# Altium PCB CapTouchKeyboard_v2.0.PcbDoc
Units mil, origin at the board's own origin, x right, y up, seen from the top; angles counter-clockwise.
Board outline 4822.83 x 2755.91 mil, 2 copper layers (Top Layer, Bottom Layer); 98 components, 52 nets, 291 pads, 275 vias.
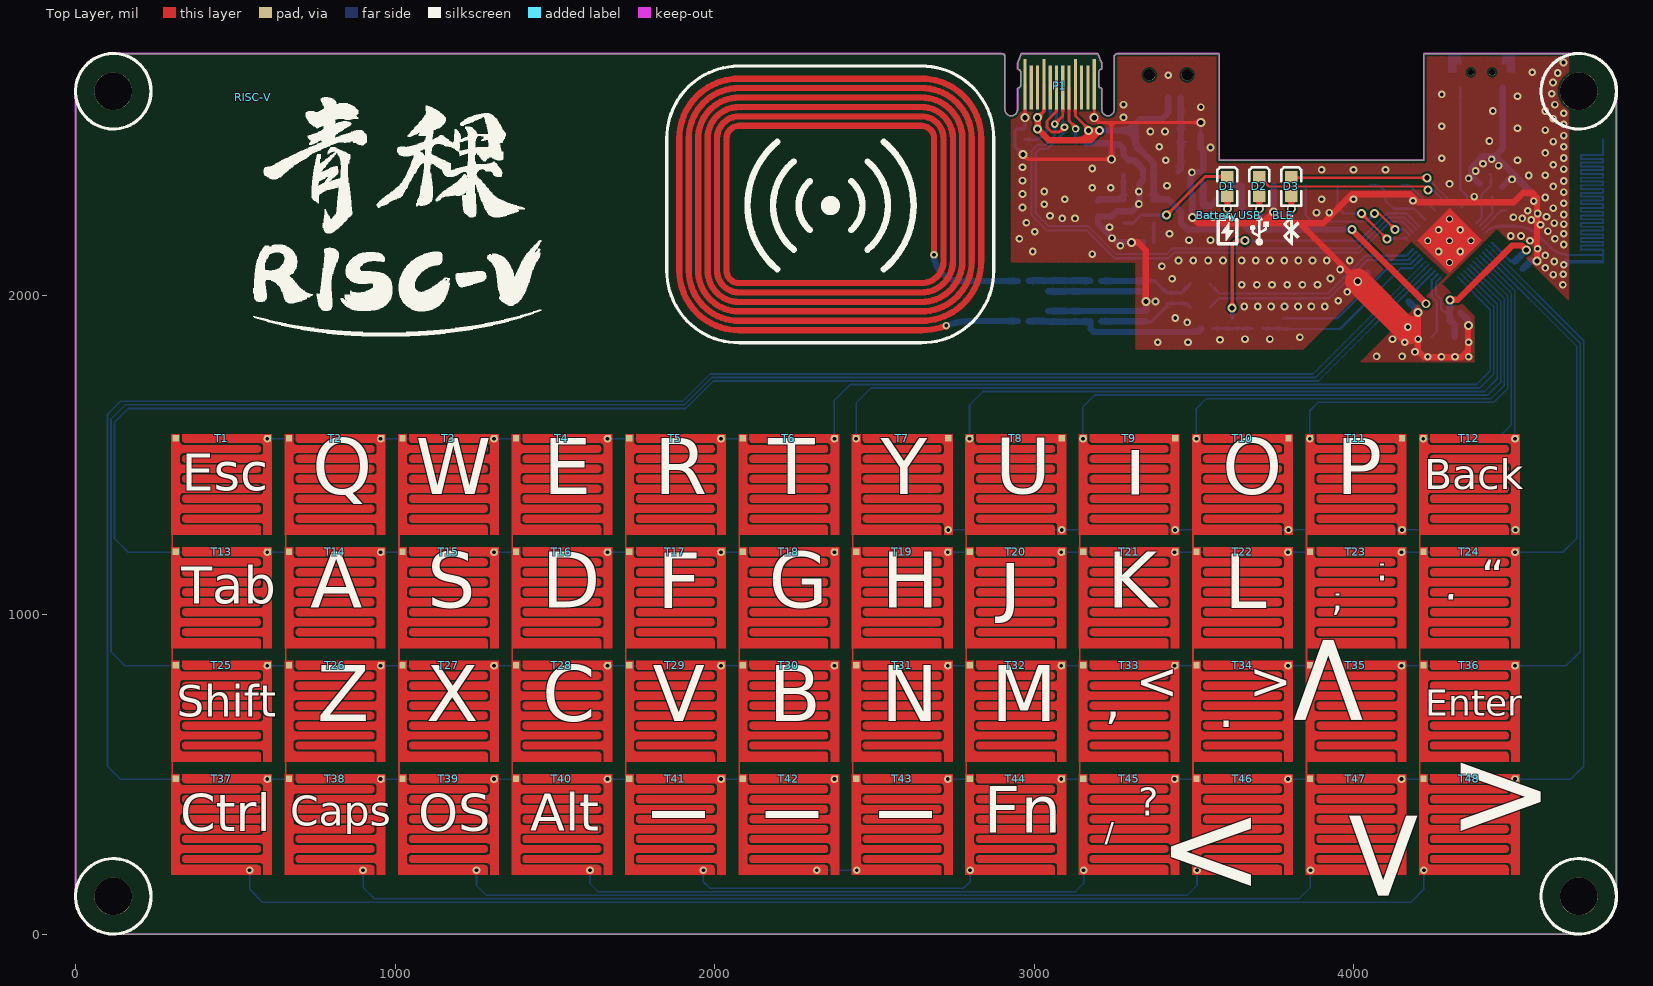
[diagram p0: Top Layer view]
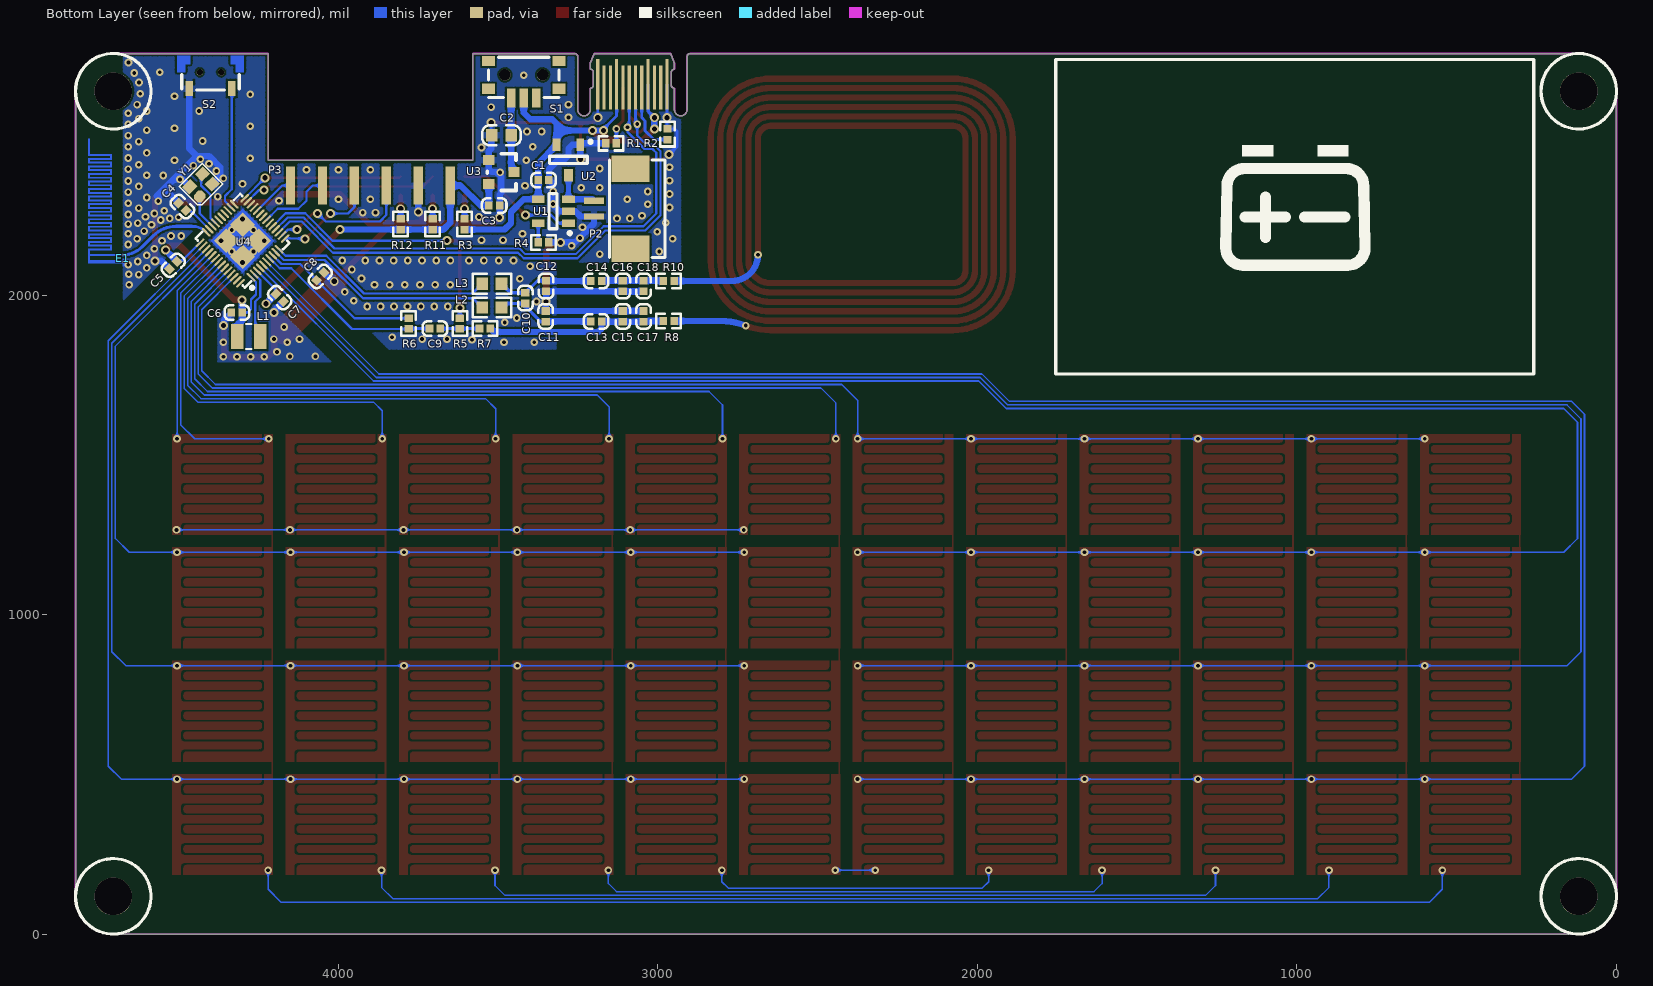
[diagram p1: Bottom Layer view, seen from below]

## Layer stack, top to bottom
Top Solder: solder mask 0.4, Solder Resist, Dk 3.5
Top Layer: signal copper 1.4
Dielectric 1: dielectric 12.6, FR-4, Dk 4.8
Bottom Layer: signal copper 1.4
Bottom Solder: solder mask 0.4, Solder Resist, Dk 3.5

## Board outline
0,118.11 0,2637.8 cw(c118.11,2637.8) 118.11,2755.91 2899.09,2755.91 cw(c2899.09,2746.06) 2908.94,2746.06 2908.94,2580.71 ccw(c2928.62,2580.71) 2948.31,2580.71 2948.31,2647.64 ccw(c2948.31,2657.48) 2958.15,2657.48 2958.15,2696.85 ccw(c2948.31,2696.85) 2948.31,2706.69 2948.31,2726.38 2960.12,2755.91 3199.88,2755.91 3211.69,2726.38 3211.69,2706.69 ccw(c3211.69,2696.85) 3201.85,2696.85 3201.85,2657.48 ccw(c3211.69,2657.48) 3211.69,2647.64 3211.69,2580.71 ccw(c3231.38,2580.71) 3251.06,2580.71 3251.06,2746.06 cw(c3260.92,2746.04) 3260.94,2755.9 3260.94,2755.85 3580.32,2755.91 3580.32,2421.25 4219.69,2421.25 4219.69,2755.9 4704.72,2755.9 4704.72,2755.91 cw(c4704.72,2637.8) 4822.83,2637.8 4822.83,118.11 cw(c4704.72,118.11) 4704.72,0 118.11,0 cw(c118.11,118.11)

## Design rules (kind name [scope] priority, off if disabled: settings)
Clearance Poly [InPolygon] p1: gap=6 ignorepadtopadclearanceinfootprint=FALSE
Clearance [All] p2: gap=6 ignorepadtopadclearanceinfootprint=FALSE
ComponentClearance [All] p1: gap=2 collisioncheckmode=3 verticalgap=10 showdistances=FALSE
DiffPairsRouting [All] p1: maxlimit=10 minlimit=6 mostfreqgap=6 toplayer_minwidth=7 toplayer_maxwidth=15 toplayer_prefwidth=7 bottomlayer_minwidth=7 bottomlayer_maxwidth=15 bottomlayer_prefwidth=7 maxuncoupledlength=500
PolygonConnect Via [IsVia] p1: connectstyle=Direct reliefconductorwidth=10 reliefentries=4 polygonreliefangle="90 Angle" airgapwidth=10
PolygonConnect [All] p2: connectstyle=Relief reliefconductorwidth=20 reliefentries=4 polygonreliefangle="90 Angle" airgapwidth=6
RoutingVias [All] p1: holewidth=28 width=50 viastyle="Through Hole" minholewidth=12 minwidth=24 maxholewidth=28 maxwidth=50
SolderMaskExpansion [All] p1: expansion=2.5 istentingtop=FALSE
Width Power [InNetClass('Power')] p1: maxlimit=80 minlimit=7 preferedwidth=20
Width [All] p2: maxlimit=40 minlimit=5 preferedwidth=10
28 further rules are at their usual default settings.

## Classes and differential pairs
net class Power: GND VBAT VBUS VCC VDCIA VINTA VSW
differential pair UD: +UD_P -UD_N

## Components (designator, comment, footprint, x,y, rotation, side; value= is the part's Value field where it differs from the comment)
Battery "Battery" IMPORTED_IMAGE 3572,2250.24 r0 top (schematic designator IMPORTED_IMAGE)
BLE "BLE" IMPORTED_IMAGE 3779.74,2250.24 r0 top (schematic designator IMPORTED_IMAGE)
C1 "1uF" 0402_C 3374.49,2360 r90 bottom
C2 "10uF" 0603_C 3459.37,2500 r0 bottom
C3 "2.2uF" 0402_C 3529.06,2280 r90 bottom
C4 "0.47uF" 0402_C 4476.5,2265 r315 bottom
C5 "0.1uF" 0402_C 4505,2105 r225 bottom
C6 "4.7uF" 0402_C 4334.72,1945 r90 bottom
C7 "2.2uF" 0402_C 4172,1980 r315 bottom
C8 "10nF" 0402_C 4068.66,2046.34 r45 bottom
C9 "10nF" 0402_C 3715,1895 r90 bottom
C10 "NC" 0402_C 3415,2007 r180 bottom
C11 "100pF 2%" 0402_C 3351.21,1950 r180 bottom
C12 "100pF 2%" 0402_C 3350,2045 r180 bottom
C13 "12pF 2%" 0402_C 3210,1917.52 r90 bottom
C14 "12pF 2%" 0402_C 3210,2044.02 r90 bottom
C15 "5pF 2%" 0402_C 3110,1950 r180 bottom
C16 "5pF 2%" 0402_C 3110,2045 r180 bottom
C17 "220pF 2%" 0402_C 3045,1950 r180 bottom
C18 "220pF 2%" 0402_C 3045,2045 r180 bottom
D1 "Red" 0603+ 3605,2310 r90 top
D2 "Green" 0603+ 3705,2310 r90 top
D3 "Blue" 0603+ 3805,2310 r90 top
E1 "ANTENNA" ANT-F-1-2.4G-0.8mmFR4-WCH 4675,2125 r90 bottom
L1 "10uH" SMD_2X2MM 4280.63,1870 r0 bottom
L2 "1uH" 0603 3550,1960.98 r180 bottom
L3 "1uH" 0603 3550,2035.55 r180 bottom
P1 "TYPE-C HS-USB" USB_TYPE_C_DS_2 3080,2755.91 r0 top
P2 "Battery" XH-2P-P1.25mm-WT 3200,2295 r270 bottom
P3 "Debug" HDR1X6H 3650,2421.25 r0 bottom
R1 "5.1K" 0402 3130,2475 r0 bottom
R2 "5.1K" 0402 2970,2520 r270 bottom
R3 "1K" 0402 3605,2238.46 r270 bottom
R4 "3.9K" 0402 3341.02,2165 r0 bottom
R5 "1kΩ" 0402 3620,1894.02 r90 bottom
R6 "NC" 0402 3780,1894.02 r90 bottom
R7 "2kΩ" 0402 3525,1895 r0 bottom
R8 "1Ω" 0402 2983,1918.53 r180 bottom
R10 "1Ω" 0402 2983,2044.02 r180 bottom
R11 "1K" 0402 3705,2205 r90 bottom
R12 "1K" 0402 3805,2205 r90 bottom
RISC-V "RISC-V" IMPORTED_IMAGE 556.97,2619.09 r0 top (schematic designator IMPORTED_IMAGE)
S1 "SW-SPDT" "SW1 - SMD (2)" 3420,2689 r0 bottom
S2 "Download" "SMD_4.1x2.3x3.5mm-KEY (2)" 4400.49,2697 r180 bottom
T1 "TouchPad" TOUCH_PAD 300,1565 r0 top
T2 "TouchPad" TOUCH_PAD 655,1565 r0 top
T3 "TouchPad" TOUCH_PAD 1010,1565 r0 top
T4 "TouchPad" TOUCH_PAD 1365,1565 r0 top
T5 "TouchPad" TOUCH_PAD 1720,1565 r0 top
T6 "TouchPad" TOUCH_PAD 2075,1565 r0 top
T7 "TouchPad" TOUCH_PAD 2430,1565 r0 top
T8 "TouchPad" TOUCH_PAD 2785,1565 r0 top
T9 "TouchPad" TOUCH_PAD 3140,1565 r0 top
T10 "TouchPad" TOUCH_PAD 3495,1565 r0 top
T11 "TouchPad" TOUCH_PAD 3850,1565 r0 top
T12 "TouchPad" TOUCH_PAD 4205,1565 r0 top
T13 "TouchPad" TOUCH_PAD 300,1210 r0 top
T14 "TouchPad" TOUCH_PAD 655,1210 r0 top
T15 "TouchPad" TOUCH_PAD 1010,1210 r0 top
T16 "TouchPad" TOUCH_PAD 1365,1210 r0 top
T17 "TouchPad" TOUCH_PAD 1720,1210 r0 top
T18 "TouchPad" TOUCH_PAD 2075,1210 r0 top
T19 "TouchPad" TOUCH_PAD 2430,1210 r0 top
T20 "TouchPad" TOUCH_PAD 2785,1210 r0 top
T21 "TouchPad" TOUCH_PAD 3140,1210 r0 top
T22 "TouchPad" TOUCH_PAD 3495,1210 r0 top
T23 "TouchPad" TOUCH_PAD 3850,1210 r0 top
T24 "TouchPad" TOUCH_PAD 4205,1210 r0 top
T25 "TouchPad" TOUCH_PAD 300,855 r0 top
T26 "TouchPad" TOUCH_PAD 655,855 r0 top
T27 "TouchPad" TOUCH_PAD 1010,855 r0 top
T28 "TouchPad" TOUCH_PAD 1365,855 r0 top
T29 "TouchPad" TOUCH_PAD 1720,855 r0 top
T30 "TouchPad" TOUCH_PAD 2075,855 r0 top
T31 "TouchPad" TOUCH_PAD 2430,855 r0 top
T32 "TouchPad" TOUCH_PAD 2785,855 r0 top
T33 "TouchPad" TOUCH_PAD 3140,855 r0 top
T34 "TouchPad" TOUCH_PAD 3495,855 r0 top
T35 "TouchPad" TOUCH_PAD 3850,855 r0 top
T36 "TouchPad" TOUCH_PAD 4205,855 r0 top
T37 "TouchPad" TOUCH_PAD 300,500 r0 top
T38 "TouchPad" TOUCH_PAD 655,500 r0 top
T39 "TouchPad" TOUCH_PAD 1010,500 r0 top
T40 "TouchPad" TOUCH_PAD 1365,500 r0 top
T41 "TouchPad" TOUCH_PAD 1720,500 r0 top
T42 "TouchPad" TOUCH_PAD 2075,500 r0 top
T43 "TouchPad" TOUCH_PAD 2430,500 r0 top
T44 "TouchPad" TOUCH_PAD 2785,500 r0 top
T45 "TouchPad" TOUCH_PAD 3140,500 r0 top
T46 "TouchPad" TOUCH_PAD 3495,500 r0 top
T47 "TouchPad" TOUCH_PAD 3850,500 r0 top
T48 "TouchPad" TOUCH_PAD 4205,500 r0 top
U1 "BL4054B" SOT-23-5 3280,2225 r90 bottom
U2 "CH213K" SOT-23-3 3242.6,2470 r0 bottom
U3 "6219P33M" SOT-23 3489.68,2385 r270 bottom
U4 "CH585M" QFN48_5X5 4300,2170 r135 bottom
USB "USB" IMPORTED_IMAGE 3675.85,2250.24 r0 top (schematic designator IMPORTED_IMAGE)
Y1 "32MHz" 2016 4434,2308 r135 bottom

## Footprints (in the part's own frame and the unit in brackets; to place one, negate y for a bottom-side part, rotate by r counter-clockwise, add the part's x,y. Pads: shape width x height; smd on the part's side, far side on the other; paste and mask are expansions set on the pad)
0402 [mm]
  rect 0.6x0.65 smd mask+0.051: 1(0,0) 2(0.85,0)
  silkscreen extent -0.55,-0.58 1.4,0.57
0402_C [mm]
  rect 0.65x0.6 smd mask+0.051: 1(0,0) 2(0,-0.85)
  silkscreen extent -0.58,-1.4 0.57,0.55
0603 [mm]
  rect 0.93x0.98 smd: 1(0,0) 2(1.54,0)
  silkscreen extent -0.76,-0.79 2.3,0.79
0603+ [mm]
  rect 0.93x0.98 smd: 1(0,0) 2(1.54,0)
  silkscreen extent -0.76,-0.79 2.27,0.79
0603_C [mm]
  rect 0.93x0.98 smd mask+0.051: 1(0,0) 2(1.54,0)
  silkscreen extent -0.76,-0.79 2.31,0.79
2016 [mm]
  oct 0.92x0.82 smd: 1(0,0)
  rect 0.92x0.82 smd: 2(1.42,0) 3(1.42,1.123) 4(0,1.123)
  silkscreen extent -0.59,-0.59 2.01,1.72
ANT-F-1-2.4G-0.8mmFR4-WCH [mm]
  rect 0.1x0.1 smd mask+0: 0(-0.525,0) 1(0,0)
  Top Layer region: 7.875,2.75 8.025,2.75 8.025,0.85 7.875,0.85
  Top Layer region: 7.875,2.75 9.275,2.75 9.275,2.6 7.875,2.6
  Top Layer region: 7.575,1 8.025,1 8.025,0.85 7.575,0.85
  Top Layer region: 6.675,2.75 6.825,2.75 6.825,0.85 6.675,0.85
  Top Layer region: 6.975,2.75 7.125,2.75 7.125,0.85 6.975,0.85
  Top Layer region: 7.275,2.75 7.425,2.75 7.425,0.85 7.275,0.85
  Top Layer region: 7.575,2.75 7.725,2.75 7.725,0.85 7.575,0.85
  Top Layer region: 6.675,2.75 7.125,2.75 7.125,2.6 6.675,2.6
  Top Layer region: 7.275,2.75 7.725,2.75 7.725,2.6 7.275,2.6
  Top Layer region: 6.375,1 6.825,1 6.825,0.85 6.375,0.85
  Top Layer region: 6.975,1 7.425,1 7.425,0.85 6.975,0.85
  Top Layer region: 5.475,2.75 5.625,2.75 5.625,0.85 5.475,0.85
  Top Layer region: 5.775,2.75 5.925,2.75 5.925,0.85 5.775,0.85
  Top Layer region: 6.075,2.75 6.225,2.75 6.225,0.85 6.075,0.85
  Top Layer region: 6.375,2.75 6.525,2.75 6.525,0.85 6.375,0.85
  Top Layer region: 5.475,2.75 5.925,2.75 5.925,2.6 5.475,2.6
  Top Layer region: 6.075,2.75 6.525,2.75 6.525,2.6 6.075,2.6
  Top Layer region: 5.175,1 5.625,1 5.625,0.85 5.175,0.85
  Top Layer region: 5.775,1 6.225,1 6.225,0.85 5.775,0.85
  Top Layer region: 4.275,2.75 4.425,2.75 4.425,0.85 4.275,0.85
  Top Layer region: 4.575,2.75 4.725,2.75 4.725,0.85 4.575,0.85
  Top Layer region: 4.875,2.75 5.025,2.75 5.025,0.85 4.875,0.85
  Top Layer region: 5.175,2.75 5.325,2.75 5.325,0.85 5.175,0.85
  Top Layer region: 4.275,2.75 4.725,2.75 4.725,2.6 4.275,2.6
  Top Layer region: 4.875,2.75 5.325,2.75 5.325,2.6 4.875,2.6
  Top Layer region: 3.975,1 4.425,1 4.425,0.85 3.975,0.85
  Top Layer region: 4.575,1 5.025,1 5.025,0.85 4.575,0.85
  Top Layer region: 3.075,2.75 3.225,2.75 3.225,0.85 3.075,0.85
  Top Layer region: 3.375,2.75 3.525,2.75 3.525,0.85 3.375,0.85
  Top Layer region: 3.675,2.75 3.825,2.75 3.825,0.85 3.675,0.85
  Top Layer region: 3.975,2.75 4.125,2.75 4.125,0.85 3.975,0.85
  Top Layer region: 3.075,2.75 3.525,2.75 3.525,2.6 3.075,2.6
  Top Layer region: 3.675,2.75 4.125,2.75 4.125,2.6 3.675,2.6
  Top Layer region: 2.775,1 3.225,1 3.225,0.85 2.775,0.85
  Top Layer region: 3.375,1 3.825,1 3.825,0.85 3.375,0.85
  Top Layer region: 1.875,2.75 2.025,2.75 2.025,0.85 1.875,0.85
  Top Layer region: 2.175,2.75 2.325,2.75 2.325,0.85 2.175,0.85
  Top Layer region: 2.475,2.75 2.625,2.75 2.625,0.85 2.475,0.85
  Top Layer region: 2.775,2.75 2.925,2.75 2.925,0.85 2.775,0.85
  Top Layer region: 1.875,2.75 2.325,2.75 2.325,2.6 1.875,2.6
  Top Layer region: 2.475,2.75 2.925,2.75 2.925,2.6 2.475,2.6
  Top Layer region: 1.575,1 2.025,1 2.025,0.85 1.575,0.85
  Top Layer region: 2.175,1 2.625,1 2.625,0.85 2.175,0.85
  Top Layer region: 0.975,1 1.425,1 1.425,0.85 0.975,0.85
  Top Layer region: 0.375,1 0.825,1 0.825,0.85 0.375,0.85
  Top Layer region: 1.275,2.75 1.725,2.75 1.725,2.6 1.275,2.6
  Top Layer region: 0.675,2.75 1.125,2.75 1.125,2.6 0.675,2.6
  Top Layer region: 0.075,2.75 0.525,2.75 0.525,2.6 0.075,2.6
  Top Layer region: 1.575,2.75 1.725,2.75 1.725,0.85 1.575,0.85
  Top Layer region: 1.275,2.75 1.425,2.75 1.425,0.85 1.275,0.85
  Top Layer region: 0.975,2.75 1.125,2.75 1.125,0.85 0.975,0.85
  Top Layer region: 0.675,2.75 0.825,2.75 0.825,0.85 0.675,0.85
  Top Layer region: 0.375,2.75 0.525,2.75 0.525,0.85 0.375,0.85
  Top Layer region: -0.675,2.6 -0.675,2.75 0.075,2.75 0.075,2.6
  Top Layer region: -0.075,2.75 0.075,2.75 0.075,-0.05 -0.075,-0.05
  Top Layer region: -0.675,2.75 -0.375,2.75 -0.375,-0.05 -0.675,-0.05
HDR1X6H [mm] "Connector; Header; 6 Position; Right Angle"
  rect 0.74x3 smd: 1(0,2) 2(2.54,2) 3(5.08,2) 4(7.62,2) 5(10.16,2) 6(12.7,2)
IMPORTED_IMAGE [mil]
  silkscreen extent 0,-94 67,0
QFN48_5X5 [mm]
  round 0.559 hole 0.381 mask+0.102: 0(-1.219,-1.219) 0(-1.219,1.219) 0(0,0) 0(1.219,-1.219) 0(1.219,1.219)
  rect 1.397x1.397 smd mask+0: 0(-0.901,-0.895) 0(-0.901,0.908) 0(0.902,-0.895) 0(0.902,0.908)
  oval 0.18x0.9 smd mask+0.051: 1(-1.575,-2.519) 2(-1.225,-2.519) 3(-0.875,-2.519) 4(-0.525,-2.519) 5(-0.175,-2.519) 6(0.175,-2.519) 7(0.525,-2.519) 8(0.875,-2.519) 9(1.225,-2.519) 10(1.575,-2.519) 25(1.575,2.519) 26(1.225,2.519) 27(0.875,2.519) 28(0.525,2.519) 29(0.175,2.519) 30(-0.175,2.519) 31(-0.525,2.519) 32(-0.875,2.519) 33(-1.225,2.519) 34(-1.575,2.519)
  oval 0.9x0.18 smd mask+0.051: 11(2.514,-2.275) 12(2.514,-1.925) 13(2.514,-1.575) 14(2.514,-1.225) 15(2.514,-0.875) 16(2.514,-0.525) 17(2.514,-0.175) 18(2.514,0.175) 19(2.514,0.525) 20(2.514,0.875) 21(2.514,1.225) 22(2.514,1.575) 23(2.514,1.925) 24(2.514,2.275) 35(-2.514,2.275) 36(-2.514,1.925) 37(-2.514,1.575) 38(-2.514,1.225) 39(-2.514,0.875) 40(-2.514,0.525) 41(-2.514,0.175) 42(-2.514,-0.175) 43(-2.514,-0.525) 44(-2.514,-0.875) 45(-2.514,-1.225) 46(-2.514,-1.575) 47(-2.514,-1.925) 48(-2.514,-2.275)
  silkscreen extent -2.51,-3.31 2.51,2.77
SMD_2X2MM [mm]
  rect 1x2 smd: 1(-0.905,0) 2(0.905,0)
  silkscreen extent -0.2,-1 0.2,1
"SMD_4.1x2.3x3.5mm-KEY (2)" [mm]
  round 0.5 hole 0.5 unplated mask+0.064: 0(-0.85,0) 0(0.85,0)
  rect 0.6x1.2 smd: 1(-1.7,-1.3) 2(1.7,-1.3)
  Top Layer region: 1.6,1.3 2.65,1.3 2.65,0 2,0 2,0.65 1.6,0.65
  Top Layer region: -1.6,1.3 -2.65,1.3 -2.65,0 -2,0 -2,0.65 -1.6,0.65
  silkscreen extent -2.29,-1.41 2.29,-0.2
SOT-23 [mm]
  rect 0.8x0.9 smd: 1(-0.95,-1) 2(0.95,-1) 3(0,1)
  silkscreen extent -1.46,-1.14 1.46,1.15
SOT-23-3 [mm] "SOT-23-3"
  rect 0.6x1 smd: 1(0,0) 2(1.9,0)
  rect 0.7x1 smd: 3(0.95,2.4)
  silkscreen extent -0.93,-0.38 2.45,1.49
SOT-23-5 [mm]
  rect 0.6x1 smd: 1(0,0) 2(0.95,0) 3(1.9,0) 4(1.9,2.4) 5(0,2.4)
  silkscreen extent -0.92,-0.22 2.35,1.54
"SW1 - SMD (2)" [mm]
  rect 1x0.8 smd: 0(-2.8,-1.1) 0(-2.8,1.1) 0(2.8,-1.1) 0(2.8,1.1)
  round 0.9 hole 0.9 unplated mask+0.064: 0(-1.5,0) 0(1.5,0)
  rect 0.7x1.5 smd: 1(-1,1.85) 2(0,1.85) 3(1,1.85)
  silkscreen extent -2.8,-1.4 2.8,1.8
TOUCH_PAD [mil] "cap touch keyboard touch pad"
  rect 19.68x19.68 smd mask+2.5: 1(13.5,-13.5) 2(301.5,-13.5)
  Top Layer region: 0,-314.95 0,0 26.83,0 26.83,-24.09 27.62,-28.07 29.87,-31.44 33.24,-33.69 37.22,-34.48 37.22,-34.48 269.54,-34.48 273.51,-35.27 276.88,-37.52 279.14,-40.89 279.93,-44.87 279.93,-44.87 279.93,-48.66 279.14,-52.63 276.88,-56 273.51,-58.26 269.54,-59.05 269.54,-59.05 37.22,-59.05 33.24,-59.84 29.87,-62.09 27.62,-65.46 26.83,-69.43 26.83,-69.43 26.83,-86.42 27.62,-90.39 29.87,-93.76 33.24,-96.01 37.22,-96.81 37.22,-96.81 269.54,-96.81 273.51,-97.6 276.88,-99.85 279.14,-103.22 279.93,-107.19 279.93,-107.19 279.93,-110.98 279.14,-114.96 276.88,-118.33 273.51,-120.58 269.54,-121.37 269.54,-121.37 37.22,-121.37 33.24,-122.16 29.87,-124.42 27.62,-127.79 26.83,-131.76 26.83,-131.76 26.83,-148.74 27.62,-152.72 29.87,-156.09 33.24,-158.34 37.22,-159.13 37.22,-159.13 269.54,-159.13 273.51,-159.92 276.88,-162.17 279.14,-165.54 279.93,-169.52 279.93,-169.52 279.93,-173.31 279.14,-177.29 276.88,-180.66 273.51,-182.91 269.54,-183.7 269.54,-183.7 37.22,-183.7 33.24,-184.49 29.87,-186.74 27.62,-190.11 26.83,-194.09 26.83,-194.09 26.83,-211.07 27.62,-215.05 29.87,-218.42 33.24,-220.67 37.22,-221.46 37.22,-221.46 269.54,-221.46 273.51,-222.25 276.88,-224.5 279.14,-227.87 279.93,-231.85 279.93,-231.85 279.93,-235.64 279.14,-239.61 276.88,-242.98 273.51,-245.24 269.54,-246.03 269.54,-246.03 37.22,-246.03 33.24,-246.82 29.87,-249.07 27.62,-252.44 26.83,-256.41 26.83,-256.41 26.83,-273.4 27.62,-277.37 29.87,-280.74 33.24,-282.99 37.22,-283.79 37.22,-283.79 269.54,-283.79 273.51,-284.58 276.88,-286.83 279.14,-290.2 279.93,-294.17 279.93,-294.17 279.93,-314.95
  Top Layer region: 288.13,-38.27 288.13,-55.25 287.34,-59.23 285.09,-62.6 281.72,-64.85 277.74,-65.64 277.74,-65.64 44.68,-65.64 40.7,-66.43 37.33,-68.68 35.08,-72.05 34.29,-76.03 34.29,-76.03 34.29,-79.82 35.08,-83.8 37.33,-87.17 40.7,-89.42 44.68,-90.21 44.68,-90.21 277.74,-90.21 281.72,-91 285.09,-93.25 287.34,-96.62 288.13,-100.6 288.13,-100.6 288.13,-117.58 287.34,-121.56 285.09,-124.93 281.72,-127.18 277.74,-127.97 277.74,-127.97 44.68,-127.97 40.7,-128.76 37.33,-131.01 35.08,-134.38 34.29,-138.36 34.29,-138.36 34.29,-142.15 35.08,-146.12 37.33,-149.49 40.7,-151.75 44.68,-152.54 44.68,-152.54 277.74,-152.54 281.72,-153.33 285.09,-155.58 287.34,-158.95 288.13,-162.92 288.13,-162.92 288.13,-179.91 287.34,-183.88 285.09,-187.25 281.72,-189.5 277.74,-190.3 277.74,-190.3 44.68,-190.3 40.7,-191.09 37.33,-193.34 35.08,-196.71 34.29,-200.68 34.29,-200.68 34.29,-204.47 35.08,-208.45 37.33,-211.82 40.7,-214.07 44.68,-214.86 44.68,-214.86 277.74,-214.86 281.72,-215.65 285.09,-217.91 287.34,-221.28 288.13,-225.25 288.13,-225.25 288.13,-242.23 287.34,-246.21 285.09,-249.58 281.72,-251.83 277.74,-252.62 277.74,-252.62 44.68,-252.62 40.7,-253.41 37.33,-255.66 35.08,-259.03 34.29,-263.01 34.29,-263.01 34.29,-266.8 35.08,-270.78 37.33,-274.15 40.7,-276.4 44.68,-277.19 44.68,-277.19 277.74,-277.19 281.72,-277.98 285.09,-280.23 287.34,-283.6 288.13,-287.58 288.13,-287.58 288.13,-314.95 314.96,-314.95 314.96,0 34.29,0 34.29,-17.49 35.08,-21.47 37.33,-24.84 40.7,-27.09 44.68,-27.88 44.68,-27.88 277.74,-27.88 281.72,-28.67 285.09,-30.92 287.34,-34.29 288.13,-38.27
USB_TYPE_C_DS_2 [mm]
  rect 0.25x4 smd paste+0 mask+0: A1(2.75,-2.45) A4(1.25,-2.45) A9(-1.25,-2.45) A12(-2.75,-2.45)
  rect 0.25x3.5 smd paste+0 mask+0: A2(2.25,-2.7) A3(1.75,-2.7) A5(0.75,-2.7) A6(0.25,-2.7) A7(-0.25,-2.7) A8(-0.75,-2.7) A10(-1.75,-2.7) A11(-2.25,-2.7)
  rect 0.25x4 smd far side paste+0 mask+0: B1(-2.75,-2.45) B4(-1.25,-2.45) B9(1.25,-2.45) B12(2.75,-2.45)
  rect 0.25x3.5 smd far side paste+0 mask+0: B2(-2.25,-2.7) B3(-1.75,-2.7) B5(-0.75,-2.7) B6(-0.25,-2.7) B7(0.25,-2.7) B8(0.75,-2.7) B10(1.75,-2.7) B11(2.25,-2.7)
  Keep-Out Layer lines w0.025: -5.595,0 -4.595,0 cw(c-4.595,-0.25) -4.345,-0.25 -4.345,-4.45 ccw(c-3.845,-4.45) -3.345,-4.45 -3.345,-2.75 ccw(c-3.345,-2.5) -3.095,-2.5 -3.095,-1.5 ccw(c-3.345,-1.5) -3.345,-1.25 -3.345,-0.75 -3.045,0 3.045,0 3.345,-0.75 3.345,-1.25 ccw(c3.345,-1.5) 3.095,-1.5 3.095,-2.5 ccw(c3.345,-2.5) 3.345,-2.75 3.345,-4.45 ccw(c3.845,-4.45) 4.345,-4.45 4.345,-0.25 cw(c4.595,-0.25) 4.595,0 5.595,0
XH-2P-P1.25mm-WT [mm]
  rect 0.5x1.6 smd: 1(0,0) 2(1.25,0)
  rect 2.1x3 smd: ""(-2.55,2.9) ""(3.8,2.9)
  silkscreen extent -3.25,1.24 4.5,5.64

## Part data
C1 C2 C3 C4 C5 C6 C7 C8 C9 C10 C11 C12 C13 C14 C15 C16 C17 C18: library part CAP, "Capacitor"
D1 D2 D3: library part LED0, "Typical INFRARED GaAs LED", LatestRevisionDate=08-Jul-2005, LatestRevisionNote="Mech Layer 1 removed.", PackageReference=LED-0, Published=8-Jun-2000, Publisher="Altium Limited"
E1: "Generic Antenna"
L1 L2 L3: library part INDUCTOR
P1: library part TYPE-C-Receptacle-2.0, "Type-C USB2.0 母座"
P2: library part "HEADER 2", "Header, 2-Pin"
P3: library part "HEADER 6", "Header, 6-Pin"
R1 R2 R3 R4 R5 R6 R7 R8 R10 R11 R12: library part RES
S1: "SPDT Subminiature Toggle Switch, Right Angle Mounting, Vertical Actuation", ComponentLink1Description="Manufacturer Link", ComponentLink1URL=http://www.apem.com, DatasheetVersion=05-Dec-2000, LatestRevisionDate=17-Dec-2003, LatestRevisionNote="Schematic revised, PCB Footprint replaced.", PackageDescription="Switch; 4 Leads", PackageReference=TL36WW15050, Published=24-Mar-1999, Publisher="Altium Limited"
S2: library part SW-PB, "Switch", LatestRevisionDate=17-Jul-2002, LatestRevisionNote="Re-released for DXP Platform.", PackageDescription="Switch; 2 Leads", PackageReference=SPST-2, Published=24-Mar-1999, Publisher="Altium Limited"
U1: "具有热调节功能的800mA独立线性锂离子电池充电器"
U2: "Ideal Diode 5V*1A"
U4: "RISC-V MCU with BLE/HSUSB/USB/NFC/ADC/PWM/2*SPI/I2C/4*UART/LCD"
Y1: library part 晶体

## Free pads (board coordinates)
  round 118.11 hole 118.11 unplated mask+2.5: 0(118.11,118.11) 0(118.11,2637.8) 0(4704.72,118.11) 0(4704.72,2637.8)

## Via types
v1: diameter 24, hole 12, Top Layer to Bottom Layer, tented both sides, 242 vias
v2: diameter 28, hole 16, Top Layer to Bottom Layer, tented both sides, 33 vias

## Nets (pads, with @x,y where several pads share a name; then routed paths per layer and width w, separated by ;. In a path a pad name is that pad's centre, name@x,y a point inside that pad or via, vN(x,y) a via of type N, cw(c..) or ccw(c..) an arc to the next point about the centre after c; other vN are vias at no path point)
ANT: E1.1 U4.34 | length 437.9
  Bottom Layer w5: U4.34 U4.34@4417.72,2200.02 ; U4.34@4413.96,2196.77 cw(c4452.05,2158.69) U4.34@4421.77,2203.23 ; U4.34@4417.72,2199.52 cw(c4461,2156.24) 4419.22,2200.98 cw(c4461,2156.24) U4.34@4421.77,2203.23 ; U4.34@4418.71,2202.29 cw(c4454.06,2166.94) 4452.97,2216.92 ; 4454.06,2216.94 ccw(c4454.06,2166.94) 4452.97,2216.92 ; 4460,2212.55 4452.05,2212.55 ccw(c4452.05,2158.69) 4427.93,2206.85 ccw(c4452.05,2158.69) U4.34@4421.77,2203.23 ; 4461,2217.45 ccw(c4461,2156.24) 4452.97,2216.92 ; U4.34@4421.77,2203.23 cw(c4461,2156.24) 4452.97,2216.92
  Bottom Layer w7: U4.34 cw(c4459.18,2151.06) 4419.22,2200.98 cw(c4459.18,2151.06) 4427.93,2206.85 cw(c4459.18,2151.06) 4459.18,2215
  Bottom Layer w10: 4459.18,2215 4508.58,2215 cw(c4508.58,2115) 4579.29,2185.71 4613.97,2151.03 ccw(c4675,2212.06) E1.1@4675,2125.75
BOOT: S2.2 U4.26 | length 391.3
  Bottom Layer w7: S2.2@4333.56,2648.82 4333.56,2331.44 4355,2310 4355,2293.21 U4.26
COL1: T1.1 T12.1 T13.1 T24.1 T25.1 T36.1 T37.1 T48.1 U4.40 | length 5048.3
  Top Layer w5: 302.5,490 302.5,550 ; 302.5,845 302.5,905 ; 302.5,1200 302.5,1260 ; 4207.5,490 4207.5,550 ; 4207.5,845 4207.5,905 ; 4207.5,1200 4207.5,1260
  Bottom Layer w5: v1(545,200) 545,140 585,100 4180,100 4220,140 v1(4220,200) ; v1(4218,1550) 4450,1550 4494,1594 4494,2005.23 U4.40
COL2: T2.1 T11.1 T14.1 T23.1 T26.1 T35.1 T38.1 T47.1 U4.41 | length 4640.7
  Top Layer w5: 657.5,490 657.5,550 ; 657.5,845 657.5,905 ; 657.5,1200 657.5,1260 ; 3852.5,490 3852.5,550 ; 3852.5,845 3852.5,905 ; 3852.5,1200 3852.5,1260
  Bottom Layer w5: v1(900,200) 900,146 935,111 3830,111 3865,146 v1(3865,200) ; v1(3863,1550) 3863,1638 3890,1665 4440,1665 4483,1708 4483,1996.74 U4.41
COL3: T3.1 T10.1 T15.1 T22.1 T27.1 T34.1 T39.1 T46.1 U4.42 | length 4245.9
  Top Layer w5: 1012.5,490 1012.5,550 ; 1012.5,845 1012.5,905 ; 1012.5,1200 1012.5,1260 ; 3497.5,490 3497.5,550 ; 3497.5,845 3497.5,905 ; 3497.5,1200 3497.5,1260
  Bottom Layer w5: v1(1255,200) 1255,152 1285,122 3480,122 3510,152 v1(3510,200) ; v1(3508,1550) 3508,1644 3540,1676 4430,1676 4472,1718 4472,1988.26 U4.42
COL4: T4.1 T9.1 T16.1 T21.1 T28.1 T33.1 T40.1 T45.1 U4.43 | length 3851.2
  Top Layer w5: 1367.5,490 1367.5,550 ; 1367.5,845 1367.5,905 ; 1367.5,1200 1367.5,1260 ; 3142.5,490 3142.5,550 ; 3142.5,845 3142.5,905 ; 3142.5,1200 3142.5,1260
  Bottom Layer w5: v1(1610,200) 1610,158 1635,133 3130,133 3155,158 v1(3155,200) ; v1(3153,1550) 3153,1650 3190,1687 4420,1687 4461,1728 4461,1979.77 U4.43
COL5: T5.1 T8.1 T17.1 T20.1 T29.1 T32.1 T41.1 T44.1 U4.44 | length 3459.2
  Top Layer w5: 1722.5,490 1722.5,550 ; 1722.5,845 1722.5,905 ; 1722.5,1200 1722.5,1260 ; 2787.5,490 2787.5,550 ; 2787.5,845 2787.5,905 ; 2787.5,1200 2787.5,1260
  Bottom Layer w5: v1(1965,200) 1965,164 1985,144 2780,144 2800,164 v1(2800,200) ; v1@2800,1552 v1(2798,1550) 2798,1656 2840,1698 4410,1698 4450,1738 4450,1971.28 U4.44
COL6: T6.1 T7.1 T18.1 T19.1 T30.1 T31.1 T42.1 T43.1 U4.45 | length 2986.3
  Top Layer w5: 2077.5,490 2077.5,550 ; 2077.5,845 2077.5,905 ; 2077.5,1200 2077.5,1260 ; 2432.5,490 2432.5,550 ; 2432.5,845 2432.5,905 ; 2432.5,1200 2432.5,1260
  Bottom Layer w5: v1(2320,200) v1(2445,200) ; v1(2443,1550) 2443,1662 2490,1709 4395,1709 4439,1753 4439,1962.8 U4.45
GND: C1.2 C2.2 C3.2 C4.2 C5.2 C6.1 C7.1 C8.2 C11.1 C12.2 C15.1 C16.2 C17.1 C18.2 E1.0 P1.A1 P1.A12 P1.B1 P1.B12 P2.2 P3.2 R1.2 R2.1 R4.1 S2.1 U1.2 U2.1 U3.1 U4.0 Y1.2 Y1.4 | length 6536.9
  Top Layer w9: v2(2971.73,2555) P1.A12 ; v2(3188.27,2555) P1.A1
  Top Layer w10: v2(2965,2440) 2980,2425 v2(3242.6,2425) 3242.6,2540 ; v2(3188.27,2555) 3203.27,2540 3242.6,2540 ; v2(3521.83,2540) 3242.6,2540
  Top Layer w20: v2(3305,2165) 3325,2165 3350,2140 v2(3350,1980) ; v2(3495.59,2242.87) 3513.46,2225 3715,2225 ; v2(3750,2260) 3715,2225 ; v2(4013.02,2043.02) 3835,2221.04 3835,2225 ; v2(4201.04,1945) 4201.04,1825 4221.04,1805 4338,1805 4358,1825 v2@4358,1905 ; v2(4574.19,2106.87) 4574.19,2305 4564,2294.81 v1(4564,2294) 4564,2315.19 4560,2319.19 4559.19,2320 4531.5,2320 4501.5,2290 4202.18,2290 4177.18,2315 3995,2315 3905,2225 3835,2225 ; 3715,2225 3835,2225
  Top Layer w40: 4146.04,1915 4191.04,1915
  Top Layer w80: v2(4013.02,2043.02) 4170.52,1885.52
  Bottom Layer w9: R2.1 2971.73,2521.73 v2(2971.73,2555) P1.B1 ; v2(3188.27,2555) P1.B12 ; C2.2@3521.83,2501.83 v2(3521.83,2540)
  Bottom Layer w10: v2(2965,2440) 2940,2465 2940,2511.69 2948.31,2520 R2.1
  Bottom Layer w20: C17.1 C15.1 C11.1 3351.21,1978.79 v2(3350,1980) C12.2 C16.2 C18.2 ; R1.2 3237.6,2475 U2.1 ; v2(3242.6,2425) U2.1 ; R4.1 v2(3305,2165) 3258.94,2165 3200,2223.94 P2.2 3242.6,2245.79 3259.21,2262.4 U1.2 3307.68,2262.4 3330,2284.72 3330,2348.98 C1.2 3341.02,2393.98 3312.6,2422.4 3295,2422.4 3280,2437.4 3280,2458.17 3268.17,2470 U2.1 ; v2(3495.59,2242.87) C3.2 3495.59,2314.41 3490,2320 3490,2370 3505,2385 3520,2385 3529.06,2394.06 U3.1 3529.06,2450.94 3521.83,2458.17 C2.2@3521.83,2501.83 ; v2(3750,2260) P3.2 ; v2(4013.02,2043.02) 4018.02,2043.02 C8.2 ; C7.1 4201.04,1950.96 v2(4201.04,1945) ; C6.1 4358,1921.72 v2@4358,1905 ; Y1.2 4370,2372 4370,2400 4405,2435 4443.5,2435 ; Y1.4 4491,2365 4513.5,2365 ; S2.1@4467.42,2648.82 S2.1 4467.42,2458.92 4443.5,2435 ; C4.2 4531.5,2320 4558.5,2320 ; C5.2 4554.19,2106.87 v2(4574.19,2106.87) ; v1(4564,2294) 4564,2302.5 4562.5,2304 4568.5,2310 4558.5,2320 ; 4443.5,2435 4513.5,2365 ; 4513.5,2365 4558.5,2320
  other v1: 4232,1806.73 4274.67,1806.73 4317.33,1806.73 4360,1806.73 4072,1808 4152,1808 4192,1822 3387.16,1852 3482,1852 4160,1852 4360,1852 3582,1860 3660,1862 3738,1862 4122,1862 4202,1862 3832,1868 4170,1900 3479.67,1914.33 3442,1928 3658,1964 3700,1964 3742,1964 3784,1964 3826,1964 3868,1964 3910,1964 3380,1980 3952,1982 3980,2010 3650,2032 3697.42,2032 3744.84,2032 3792.26,2032 3839.68,2032 3887.1,2032 4655,2032 3432,2050.91 3928,2052 4625,2064 4656,2065 3958,2080 4600,2085 3400,2090 4658,2095 4628,2105 3452,2108.25 3498.4,2108.25 3544.8,2108.25 3591.2,2108.25 3649.6,2108.25 3694,2108.25 3738.4,2108.25 3782.8,2108.25 3827.2,2108.25 3871.6,2108.25 3916,2108.25 3988,2108.25 4600,2124 3182,2128 2996,2136 4266.06,2136.06 4333.94,2136.06 4576,2145 3270,2154 4658,2157.98 4552,2170 3485,2171.95 3552,2171.95 2954,2176 4630,2176 3244,2178 4492,2185 4524,2185 3424,2191.7 4658,2192 3002,2198 4608,2200 4266.06,2203.94 4333.94,2203.94 3236,2212 4585,2220 4658,2222 4628,2225 2976,2226 4556,2235 3088,2240 3128,2240 4528,2240 4500,2243.23 3560,2244.22 4604,2245 3050,2248 4658,2252 4576,2255 3884,2258 3924,2258 4545,2264 4625,2272 2964,2274 3032,2284 3328,2284.72 4658,2287 4186,2295 3096,2300 3900,2300 4000,2300 4600,2305 4377.74,2308 2964,2316 4658,2322 3032,2324 3328,2324 3182,2336 3240,2336 4625,2340 3416,2342 4300,2348 4658,2357 2964,2358 4496,2362 4360,2365 4548,2374 4600,2375 3494,2384 4382,2388 3900,2392 4000,2392 4100,2392 4658,2394 3182,2396 2964,2400 4454,2405 4625,2408 4405,2411 3412,2422 4513,2422 4432,2425 4276,2428 4658,2429 4600,2445 3552,2462 3392,2464 4658,2464 4625,2480 4425,2482 4658,2499 3364,2512 3410,2512 4600,2516 4513,2522 4276,2528 4658,2534 4625,2552 3280,2556 4658,2569 4436,2576 4600,2576 3522,2588 3280,2596 4630,2596 4513,2622 4276,2628 4620,2630 4624,2665 3420,2688 4639,2695 4559.22,2697.15 4657,2728
  other v2: 4360,1905
LED_BLE: D3.2 U4.24 | length 516.2
  Top Layer w7: D3.2 3808.67,2366.96 v2(4229.71,2366.96)
  Bottom Layer w7: v2(4229.71,2366.96) U4.24
LED_USB: D2.2 U4.23 | length 610.5
  Top Layer w7: D2.2 3735.63,2340 4222.18,2340 v2(4233.25,2328.93)
  Bottom Layer w7: v2(4233.25,2328.93) 4248.25,2328.93 U4.23
NetC2_1: C2.1 S1.3 U3.3 | length 235.9
  Bottom Layer w15: U3.3 U3.3@3459.37,2394.05
  Bottom Layer w20: U3.3@3459.37,2394.05 C2.1 S1.3@3459.37,2617.17
NetC9_2: C9.2 R5.1 R7.2 | length 123.9
  Bottom Layer w7: R5.1@3619.02,1895 R5.1
  Bottom Layer w10: R7.2 R5.1@3619.02,1895 ; R5.1 3620.98,1895 C9.2
NetC10_1: C10.1 C12.1 C14.1 L3.2 | length 306
  Bottom Layer w10: C12.1 3377,2045 C10.1 3460.82,2007 L3.2
  Bottom Layer w20: C14.1 C12.1@3349.02,2044.02
NetC10_2: C10.2 C11.2 C13.1 L2.2 | length 312.2
  Bottom Layer w10: C11.2 3366.54,1916.54 3415,1965 C10.2 3476.82,1973.54 L2.2
  Bottom Layer w20: C13.1 C11.2@3350.23,1917.52
NetC13_2: C13.2 C15.2 C17.2 R7.1 R8.1 | length 574.7
  Bottom Layer w20: R8.1 3043.01,1918.53 C17.2 C15.2 3175.55,1916.54 C13.2 3176.54,1895 3187.39,1884.15 3514.15,1884.15 R7.1
NetC14_2: C14.2 C16.1 C18.1 R10.1 | length 194.4
  Bottom Layer w19.68: R10.1 R10.1@2983.98,2045
  Bottom Layer w20: R10.1@2983.98,2045 C18.1 C16.1 3175.55,2045 C14.2
NetD1_1: D1.1 R3.1 | length 71.5
  Top Layer w15: v2(3605,2270) D1.1
  Bottom Layer w15: R3.1 v2(3605,2270)
NetD1_2: D1.2 U1.1 | length 385.3
  Top Layer w9: v2(3415,2250) 3535.63,2370.63 D1.2
  Bottom Layer w9: U1.1 3310,2225 3335,2250 v2(3415,2250)
NetD2_1: D2.1 R11.2 | length 71.5
  Top Layer w15: v2(3705,2270) D2.1
  Bottom Layer w15: R11.2 v2(3705,2270)
NetD3_1: D3.1 R12.2 | length 71.5
  Top Layer w15: v2(3805,2270) D3.1
  Bottom Layer w15: R12.2 v2(3805,2270)
NetP1_A5: P1.A5 R1.1 | length 183.1
  Top Layer w9: P1.A5 3109.53,2545.47 3130,2525 v1(3130,2520)
  Bottom Layer w10: R1.1 v1(3130,2520)
NetP1_B5: P1.B5 R2.2 | length 221.2
  Bottom Layer w9: R2.2 3012.29,2486.54 3040,2514.25 3040,2545 3050.47,2555.47 P1.B5
NetR4_2: R4.2 U1.5 | length 60
  Bottom Layer w10: R4.2 U1.5
NetR8_2: R8.2 R10.2 | length 16434.2
  Top Layer w19.68: v1(2687.01,2125.98) 2687.01,2490.16 ccw(c2647.64,2490.16) 2647.64,2529.53 2076.77,2529.53 ccw(c2076.77,2490.16) 2037.4,2490.16 2037.4,2076.77 ccw(c2076.77,2076.77) 2076.77,2037.4 2647.64,2037.4 ccw(c2647.64,2106.3) 2716.54,2106.3 2716.54,2490.16 ccw(c2647.64,2490.16) 2647.64,2559.05 2076.77,2559.05 ccw(c2076.77,2490.16) 2007.87,2490.16 2007.87,2076.77 ccw(c2076.77,2076.77) 2076.77,2007.87 2647.64,2007.87 ccw(c2647.64,2106.3) 2746.06,2106.3 2746.06,2490.16 ccw(c2647.64,2490.16) 2647.64,2588.58 2076.77,2588.58 ccw(c2076.77,2490.16) 1978.35,2490.16 1978.35,2076.77 ccw(c2076.77,2076.77) 2076.77,1978.35 2647.64,1978.35 ccw(c2647.64,2106.3) 2775.59,2106.3 2775.59,2490.16 ccw(c2647.64,2490.16) 2647.64,2618.11 2076.77,2618.11 ccw(c2076.77,2490.16) 1948.82,2490.16 1948.82,2076.77 ccw(c2076.77,2076.77) 2076.77,1948.82 2647.64,1948.82 ccw(c2647.64,2106.3) 2805.12,2106.3 2805.12,2490.16 ccw(c2647.64,2490.16) 2647.64,2647.64 2076.77,2647.64 ccw(c2076.77,2490.16) 1919.29,2490.16 1919.29,2076.77 ccw(c2076.77,2076.77) 2076.77,1919.29 2647.64,1919.29 ccw(c2647.64,2106.3) 2834.65,2106.3 2834.65,2490.16 ccw(c2647.64,2490.16) 2647.64,2677.17 2076.77,2677.17 ccw(c2076.77,2490.16) 1889.76,2490.16 1889.76,2076.77 ccw(c2076.77,2076.77) 2076.77,1889.76 2647.64,1889.76 ccw(c2647.64,2106.3) v1(2725.24,1904.15)
  Bottom Layer w19.68: v1(2687.01,2125.98) ccw(c2768.98,2125.98) 2768.98,2044.02 R10.2 ; v1(2725.24,1904.15) cw(c2802.84,1701.99) 2802.84,1918.53 R8.2
NFC+: L2.1 U4.9 | length 717.4
  Bottom Layer w7: L2.1 3579.02,1990 3923.38,1990 4043.38,2110 4170.75,2110 4194.74,2133.99 U4.9
NFC-: L3.1 U4.10 | length 706.2
  Bottom Layer w7: L3.1 3580.55,2005 3920,2005 4038,2123 4165.31,2123 U4.10
NFC_CTR: R5.2 U4.15 | length 874.6
  Top Layer w10: v2(3620,1960) 3620,2160 3630.18,2170.18 v2(3660,2170.18)
  Bottom Layer w7: v2(3660,2170.18) 4018.33,2170.18 4104.02,2255.87 4165.41,2255.87 U4.15
  Bottom Layer w10: R5.2 v2(3620,1960)
NFCI: C9.1 R6.1 U4.7 | length 592
  Bottom Layer w7: R6.1 3957.34,1894.02 4147.32,2084 4183.73,2084 4214.23,2114.5 U4.7
  Bottom Layer w10: C9.1 3779.02,1895 R6.1
NFCM: C8.1 R6.2 U4.8 | length 507
  Bottom Layer w7: R6.2 3949.81,1927.48 C8.1 4119.33,2097 4178.28,2097 U4.8
ROW1: T1.2 T2.2 T3.2 T4.2 T5.2 T6.2 U4.46 | length 4321.9
  Bottom Layer w5: v1(600,1550) v1(955,1550) v1(1310,1550) v1(1665,1550) v1(2020,1550) v1(2375,1550) 2375,1670 2425,1720 4385,1720 4428,1763 4428,1954.31 U4.46
ROW2: T13.2 T14.2 T15.2 T16.2 T17.2 T18.2 U4.4 | length 6957.5
  Bottom Layer w5: v1(2375,1195) v1(2020,1195) v1(1665,1195) v1(1310,1195) v1(955,1195) v1(600,1195) 165,1195 122,1238 122,1602 165,1645 1910,1645 1996,1731 3890.23,1731 U4.4
ROW3: T25.2 T26.2 T27.2 T28.2 T29.2 T30.2 U4.5 | length 7334
  Bottom Layer w5: v1(2375,840) v1(2020,840) v1(1665,840) v1(1310,840) v1(955,840) v1(600,840) 155,840 111,884 111,1612 155,1656 1905,1656 1991,1742 3881.74,1742 U4.5
ROW4: T37.2 T38.2 T39.2 T40.2 T41.2 T42.2 U4.6 | length 7716.5
  Bottom Layer w5: v1(2375,485) v1(2020,485) v1(1665,485) v1(1310,485) v1(955,485) v1(600,485) 140,485 100,525 100,1627 140,1667 1900,1667 1986,1753 3873.26,1753 U4.6
ROW5: T7.2 T8.2 T9.2 T10.2 T11.2 T12.2 U4.39 | length 2395.2
  Bottom Layer w5: v1(2731.5,1265) v1(3086.5,1265) v1(3441.5,1265) v1(3796.5,1265) v1(4151.5,1265) v1(4506.5,1265) ; U4.39 4505,2013.72 v1(4505,1550)
ROW6: T19.2 T20.2 T21.2 T22.2 T23.2 T24.2 U4.38 | length 3003.7
  Bottom Layer w5: v1(2730,1195) v1(3085,1195) v1(3440,1195) v1(3795,1195) v1(4150,1195) v1(4505,1195) 4655,1195 4698,1238 4698,1840.21 U4.38
ROW7: T31.2 T32.2 T33.2 T34.2 T35.2 T36.2 U4.37 | length 3379.3
  Bottom Layer w5: v1(2730,840) v1(3085,840) v1(3440,840) v1(3795,840) v1(4150,840) v1(4505,840) 4665,840 4709,884 4709,1848.69 U4.37
ROW8: T43.2 T44.2 T45.2 T46.2 T47.2 T48.2 U4.36 | length 3758
  Bottom Layer w5: v1(2730,485) v1(3085,485) v1(3440,485) v1(3795,485) v1(4150,485) v1(4505,485) 4680,485 4720,525 4720,1857.18 U4.36
RXD: P3.6 U4.20 | length 136.7
  Bottom Layer w7: P3.6 4176.21,2342.51 U4.20
SWCLK: P3.4 U4.11 | length 330.9
  Top Layer w7: v2(4025,2255) v2(4105,2175)
  Bottom Layer w7: P3.4 3950,2275.28 3970.28,2255 v2(4025,2255) ; v2(4105,2175) 4106.65,2176.65 U4.11 U4.11@4163.33,2180
SWDIO: P3.3 U4.12 | length 465.9
  Top Layer w7: v2(4065,2255) 4080,2255 v2(4130,2205)
  Bottom Layer w7: P3.3 3850,2250.13 3870.13,2230 4040,2230 v2(4065,2255) ; v2(4130,2205) 4157.82,2205 U4.12
TXD: P3.5 U4.17 | length 236
  Bottom Layer w7: P3.5 4080.75,2342.51 4100,2323.26 4100,2295.38 4125.38,2270 4190.26,2270 U4.17
UD_N: P1.A7 P1.B7 U4.14 | length 1959.6
  Top Layer w9: P1.A7 3070.16,2575.16 3040,2545 3040,2525 3055,2510 3080,2510 v1(3095,2525)
  Bottom Layer w7: v1(3095,2525) 3095,2510 3042,2457 3017,2457 3005,2445 3005,2255 3045,2215 3170,2215 3256.95,2128.05 3415,2128.05 3432.34,2145.39 4011.93,2145.39 4105.56,2239.02 4105.64,2239.02 4109.49,2242.87 4158.92,2242.87 U4.14
  Bottom Layer w9: P1.B7 3089.84,2530.16 v1(3095,2525)
UD_P: P1.A6 P1.B6 U4.13 | length 1882.9
  Top Layer w9: v1(3065,2535) 3089.84,2559.84 P1.A6
  Bottom Layer w7: v1(3065,2535) 3065,2499.21 3035.79,2470 3011.62,2470 2992,2450.38 2992,2249.62 3039.62,2202 3164.62,2202 3251.57,2115.05 3420.38,2115.05 3437.73,2132.39 4017.31,2132.39 4110.94,2226.02 4111.03,2226.02 4114.88,2229.87 4152.44,2229.87 U4.13
  Bottom Layer w9: v1(3065,2535) 3070.16,2540.16 P1.B6
VBAT: P2.1 U1.3 U2.3 | length 157.7
  Bottom Layer w15: U1.3 U2.3
  Bottom Layer w20: P2.1 3204.8,2299.8 U1.3
VBUS: C1.1 P1.A4 P1.A9 P1.B4 P1.B9 R3.2 S1.2 U1.4 U2.2 | length 1842
  Top Layer w9: v2(3011.1,2555) 3030.79,2574.68 P1.A9 ; P1.A4 3129.21,2560.79 v2@3170,2520
  Top Layer w20: v2(3011.1,2555) v2(3011.1,2520) 3046.1,2485 3170,2485 ; 3170,2485 3175,2485 3180,2490 ; 3170,2485 v2(3170,2515) v2@3180,2515 ; 3180,2490 v2@3180,2515 ; 3180,2490 v2(3205,2515) v2@3180,2515
  Bottom Layer w9: v2(3011.1,2555) 3030.79,2574.68 P1.B4 ; P1.B9 3129.21,2560.79 v2@3170,2520
  Bottom Layer w20: v2(3011.1,2520) v2(3011.1,2555) ; v2(3170,2515) v2(3205,2515) 3295.28,2515 ; 3317.4,2535 U2.2 ; S1.2@3420,2617.17 3420,2570 3400,2550 3330.28,2550 3295.28,2515 ; R3.2 3480,2205 3460,2225 3460,2260 3420.2,2299.8 U1.4 C1.1 3374.49,2412.91 U2.2 ; 3295.28,2515 3317.4,2492.87 U2.2
VCC: C3.1 C7.2 P3.1 R11.1 R12.1 U3.2 U4.3 | length 1152.2
  Top Layer w20: v2(3994.66,2204.66) v2(4226.59,1972.73)
  Bottom Layer w7: C7.2 4195.66,2016.95 U4.3
  Bottom Layer w20: U3.2 C3.1 3555,2280 3617.51,2342.51 P3.1 3650,2225.88 3670.88,2205 R11.1 R12.1 v2@3994.66,2205 ; C7.2 v2(4226.59,1972.73)
VDCIA: C5.1 C6.2 L1.2 U4.1 U4.35 | length 728
  Top Layer w20: v2(4301.26,1985) 4326.26,1985 4496.26,2155 4526.06,2155 v2(4540.53,2140.53)
  Bottom Layer w7: U4.1 4258,2040.31 4258,2002 4273.86,1986.14 4273.86,1956.14 4285,1945 C6.2 ; U4.35 4491.67,2105 C5.1
  Bottom Layer w20: v2(4301.26,1985) C6.2 4301.26,1920 4316.26,1905 L1.2 ; C5.1 v2(4540.53,2140.53)
VINTA: C4.1 U4.33 | length 96.7
  Bottom Layer w7: U4.33 4463.2,2265 C4.1
VSW: L1.1 U4.2 | length 216.1
  Bottom Layer w7: L1.1 4260,1885 4260,1980 4245,1995 4245,2046.8 U4.2
X32MI: U4.32 Y1.1 | length 108.6
  Bottom Layer w7: U4.32 4434,2255.28 Y1.1
X32MO: U4.31 Y1.3 | length 173.8
  Bottom Layer w7: U4.31 4400.49,2241.26 4400.49,2313.53 4430,2343.05 4430,2374.54 Y1.3
pads on no net: P1.A2 P1.A3 P1.A8 P1.A10 P1.A11 P1.B2 P1.B3 P1.B8 P1.B10 P1.B11 P2. S1.0 S1.1 S2.0 U4.16 U4.18 U4.19 U4.21 U4.22 U4.25 U4.27 U4.28 U4.29 U4.30 U4.47 U4.48
copper on no net: | length 9.7
  Bottom Layer w10: 3620,1950.29 3620,1960

## Polygon pours and split planes (outlines as drawn)
GND on Bottom Layer "Bottom Layer-GND" (hatched 90Degree grid 4 track 5, remove dead copper, pour order 0): 2929.13,2755.91 4673.23,2755.91 4673.23,1791.34 3937.01,1791.34 3937.01,1830.71 3318.9,1830.71 3318.9,2102.36 2929.13,2102.36
GND on Top Layer "Top Layer-GND" (hatched 90Degree grid 4 track 5, remove dead copper, pour order 2): 2929.13,2755.91 4673.23,2755.91 4673.23,1791.34 3937.01,1791.34 3937.01,1830.71 3318.9,1830.71 3318.9,2102.36 2929.13,2102.36

## Keep-outs
Keep-Out Layer:
  the board outline again, w5

## Other copper
Top Layer:
  region net GND: 4300.69,2069.77 4401.81,2170.88 4300.69,2272 4199.58,2170.88
  pour cut-out: 4181.1,2169.29 4295.28,2062.99 4003.94,1771.65 3783.46,1771.65
  pour cut-out: 4448.82,2208.66 4685.04,1972.44 4685.04,1771.65 4377.95,1771.65 4377.95,1933.07 4275.59,2035.43
Bottom Layer:
  region net GND: 4300.17,2069.06 4401.28,2170.17 4300.17,2271.29 4199.05,2170.17
  rectangle net GND: 4660,2089.25 4675.8,2114.75
  pour cut-out: 4181.1,2169.29 4295.28,2062.99 4003.94,1771.65 3783.46,1771.65
  pour cut-out: 4448.82,2208.66 4685.04,1972.44 4685.04,1771.65 4377.95,1771.65 4377.95,1933.07 4350.39,1960.63 4314.96,1960.63 4314.96,1996.06 4275.59,2035.43

## Silkscreen, mask and mechanical layers (free items; w line width, h text height)
Top Overlay:
  circle w10: c118.11,2637.8 r118.11
  circle w40: c2363,2280 r10
  circle w10: c4704.72,2637.8 r118.11
  circle w10: c4704.72,118.11 r118.11
  circle w10: c118.11,118.11 r118.11
  lines w10: 2074.99,2716.53 ccw(c2076.77,2490.16) 1850.39,2490.16 1850.39,2076.77 ccw(c2076.77,2076.77) 2076.77,1850.39 2647.64,1850.39 ccw(c2647.64,2076.77) 2874.02,2076.77 2874.02,2490.16 ccw(c2647.64,2490.16) 2647.64,2716.54 2076.77,2716.54
  lines w20: 2195.88,2080.83 cw(c2363,2280) 2195.88,2479.17 ; 2247.3,2142.11 cw(c2363,2280) 2247.3,2417.89 ; 2298.72,2203.4 cw(c2363,2280) 2298.72,2356.6 ; 2427.28,2203.4 ccw(c2363,2280) 2427.28,2356.6 ; 2478.7,2142.11 ccw(c2363,2280) 2478.7,2417.89 ; 2530.12,2080.83 ccw(c2363,2280) 2530.12,2479.17
  text "Back" at 4221.27,1360.73 h160
  text "Esc" at 332.26,1349.03 h200
  text "U" at 2879.16,1319.77 h300
  text "Q" at 740.97,1319.36 h300
  text "W" at 1064.31,1318.94 h300
  text "E" at 1464.58,1318.94 h300
  text "R" at 1811.8,1318.8 h300
  text "T" at 2168.75,1318.94 h300
  text "Y" at 2519.58,1318.94 h300
  text "I" at 3282.62,1318.94 h300
  text "O" at 3589.16,1318.8 h300
  text "P" at 3945.55,1318.94 h300
  text ":" at 4069.27,1077.82 h150
  text "“" at 4398.97,1035.82 h180
  text "Tab" at 331.52,994.03 h200
  text ";" at 3930.84,984.48 h150
  text "J" at 2891.11,964.77 h300
  text "A" at 735.28,963.94 h300
  text "S" at 1101.53,963.8 h300
  text "D" at 1459.58,963.94 h300
  text "F" at 1820.69,963.94 h300
  text "G" at 2169.03,963.8 h300
  text "H" at 2523.61,963.94 h300
  text "K" at 3228.47,963.94 h300
  text "L" at 3594.58,963.94 h300
  text "‘" at 4285.84,942.48 h180
  text "<" at 3318.04,697.08 h200
  text ">" at 3673.23,697.08 h200
  text "Enter" at 4224.78,656.57 h140
  text "Shift" at 317.55,647.24 h170
  text "," at 3220.84,636.33 h200
  text ">" at 4142.65,627.63 h500 r90
  text "Z" at 756.11,608.94 h300
  text "X" at 1097.78,608.94 h300
  text "C" at 1460.14,608.8 h300
  text "V" at 1806.81,608.94 h300
  text "B" at 2169.44,608.94 h300
  text "N" at 2520.97,608.94 h300
  text "M" at 2866.11,608.94 h300
  text "." at 3575.84,608.94 h200
  text ">" at 3722.38,477.69 h500 r180
  text ">" at 3872.31,412.42 h500 r270
  text "_" at 1808.42,361.04 h400
  text "_" at 2163.42,361.04 h400
  text "_" at 2518.42,361.04 h400
  text "?" at 3326.1,341.59 h150
  text "Caps" at 672.6,308.46 h160
  text "Alt" at 1422.9,283.66 h200
  text "Ctrl" at 327.36,283.39 h200
  text "OS" at 1072.34,283.39 h200
  text "Fn" at 2842.05,268.71 h250
  text "/" at 3220.65,267.38 h120
  text ">" at 4292.58,207.36 h500
Bottom Overlay:
  circle w10: c118.11,2637.8 r118.11
  circle w10: c4704.72,2637.8 r118.11
  circle w10: c4704.72,118.11 r118.11
  circle w10: c118.11,118.11 r118.11
  region: 936,2470 838,2470 838,2434 936,2434
  rectangle: 1074,2434 1172,2470
  lines w10: 258.94,1752.76 258.94,2737.01 1755,2737.01 1755,1752.76 258.94,1752.76
  lines w35: 850,2244 976,2244 ; 1036,2244 1162,2244 ; 1099,2181 1099,2307 ; 1160,2093 842,2093 cw(c842,2148) 787,2148 791,2341 cw(c846,2341) 846,2396 1164,2396 cw(c1164,2341) 1219,2341 1223,2148 cw(c1168,2148) 1168,2093
Mechanical 1:
  lines w5: 3260.94,2755.85 3580.32,2755.91 3580.32,2421.25 4219.69,2421.25 4219.69,2755.9 4704.72,2755.9 cw(c4704.72,2637.8) 4822.83,2637.8 4822.83,118.11 cw(c4704.72,118.11) 4704.72,0 118.11,0 cw(c118.11,118.11) 0,118.11 0,2637.8 cw(c118.11,2637.8) 118.11,2755.91 2899.09,2755.91 cw(c2899.09,2746.06) 2908.94,2746.06 2908.94,2580.71 ccw(c2928.62,2580.71) 2948.31,2580.71 2948.31,2647.64 ccw(c2948.31,2657.48) 2958.15,2657.48 2958.15,2696.85 ccw(c2948.31,2696.85) 2948.31,2706.69 2948.31,2726.38 2960.12,2755.91 3199.88,2755.91 3211.69,2726.38 3211.69,2706.69 ccw(c3211.69,2696.85) 3201.85,2696.85 3201.85,2657.48 ccw(c3211.69,2657.48) 3211.69,2647.64 3211.69,2580.71 ccw(c3231.38,2580.71) 3251.06,2580.71 3251.06,2746.06 cw(c3260.92,2746.04) 3260.94,2755.9 ; 4149.69,2421.25 4150,2421.57